# Altium PCB PCB1.PcbDoc
Units mil, origin at the board's own origin, x right, y up, seen from the top; angles counter-clockwise.
Board outline 1495 x 625 mil, 2 copper layers (Top Layer, Bottom Layer); 8 components, 8 nets, 17 pads, 0 vias.
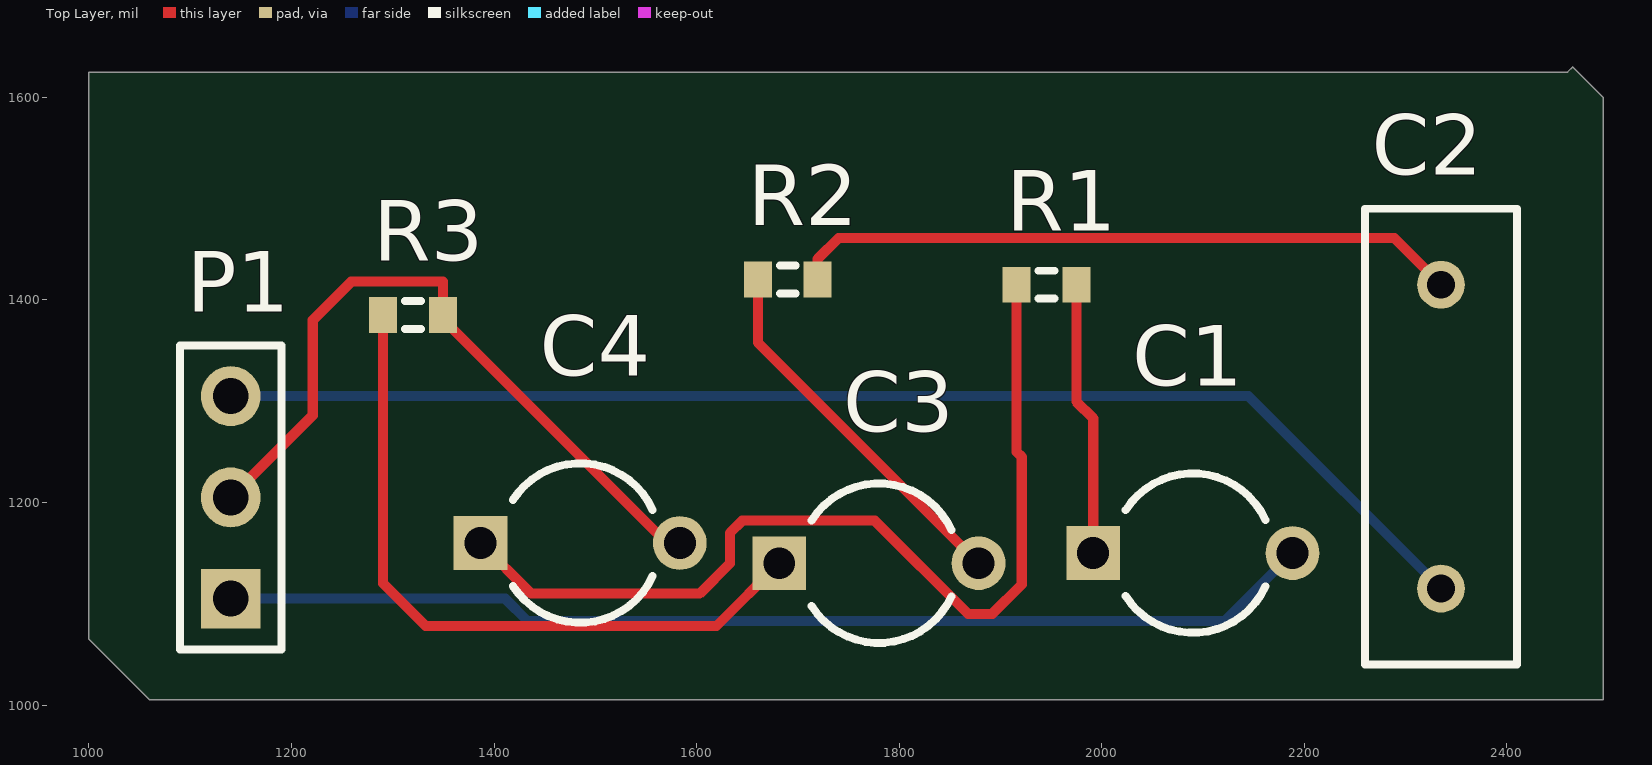
[diagram p0: Top Layer view]
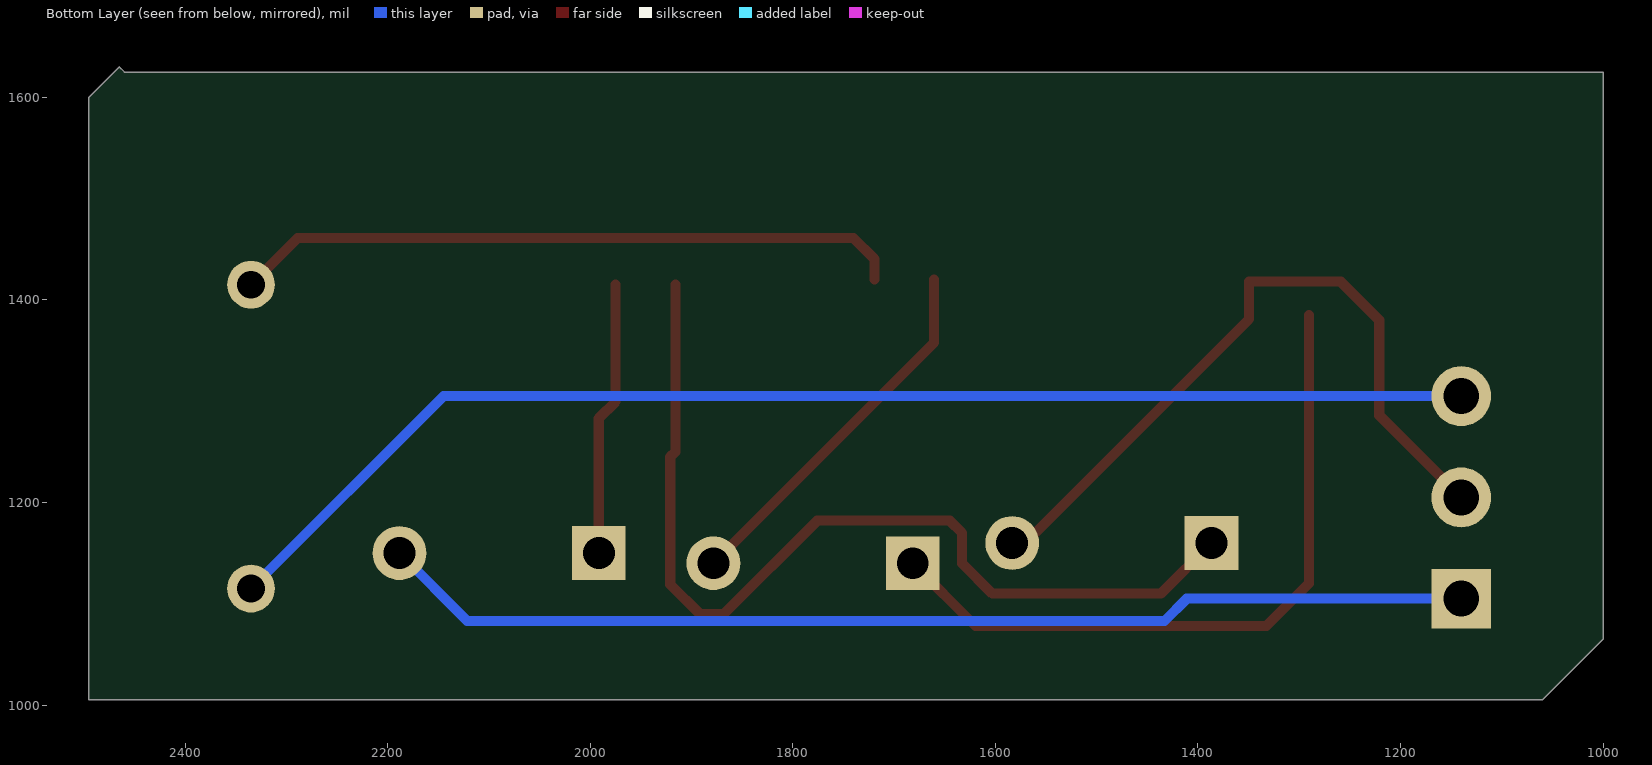
[diagram p1: Bottom Layer view, seen from below]

## Layer stack, top to bottom
Top Solder: solder mask 0.4, Solder Resist, Dk 3.5
Top Layer: signal copper 1.4
Dielectric 1: dielectric 12.6, FR-4, Dk 4.8
Bottom Layer: signal copper 1.4
Bottom Solder: solder mask 0.4, Solder Resist, Dk 3.5

## Board outline
1000,1625 2460,1625 2465,1630 2495,1600 2495,1005 1060,1005 1000,1065

## Design rules (kind name [scope] priority, off if disabled: settings)
Clearance "GND net width" [All] p1: gap=10 ignorepadtopadclearanceinfootprint=FALSE except(0: Arc-Hole Track-Hole SMDPad-Hole THPad-Hole Via-Hole Fill-Hole Poly-Hole Region-Hole Text-Hole)
Clearance "GND net width" [InNet('-12v')] p2: gap=10 ignorepadtopadclearanceinfootprint=FALSE except(0: Arc-Hole Track-Hole SMDPad-Hole THPad-Hole Via-Hole Fill-Hole Poly-Hole Region-Hole Text-Hole)
Clearance "GND net width" [InNet('-12v')] p3: gap=10 ignorepadtopadclearanceinfootprint=FALSE except(0: Arc-Hole Track-Hole SMDPad-Hole THPad-Hole Via-Hole Fill-Hole Poly-Hole Region-Hole Text-Hole)
Clearance [All] p4: gap=10 ignorepadtopadclearanceinfootprint=FALSE except(0: Arc-Hole Track-Hole SMDPad-Hole THPad-Hole Via-Hole Fill-Hole Poly-Hole Region-Hole Text-Hole)
PolygonConnect [All] p1: connectstyle=Relief reliefconductorwidth=10 reliefentries=4 polygonreliefangle="90 Angle" airgapwidth=10
RoutingVias [All] p1: holewidth=28 width=50 viastyle="Through Hole" minholewidth=28 minwidth=50 maxholewidth=28 maxwidth=50
SolderMaskExpansion [All] p1: expansion=4 istentingtop=FALSE
Width [All] p1: maxlimit=10 minlimit=10 preferedwidth=10
30 further rules are at their usual default settings.

## Components (designator, comment, footprint, x,y, rotation, side; value= is the part's Value field where it differs from the comment)
C1 "Cap Pol1" CAPR5-4X5 2090,1150 r0 top value=100pF
C2 "Cap" RAD-0.3 2335,1265 r90 top value=100pF
C3 "Cap Pol1" CAPR5-4X5 1780,1140 r0 top value=100pF
C4 "Cap Pol1" CAPR5-4X5 1485,1160 r0 top value=100pF
P1 "power" HDR1X3 1140,1105 r90 top
R1 "Res3" J1-0603 1945.47,1415 r0 top value=1K
R2 "Res3" J1-0603 1690,1420 r0 top value=1K
R3 "Res3" J1-0603 1320,1385 r0 top value=1K

## Footprints (in the part's own frame and the unit in brackets; to place one, negate y for a bottom-side part, rotate by r counter-clockwise, add the part's x,y. Pads: shape width x height; smd on the part's side, far side on the other; paste and mask are expansions set on the pad)
CAPR5-4X5 [mm] "Capacitor; 2 Leads"
  rect 1.35x1.35 hole 0.8: 1(-2.5,0)
  round 1.35 hole 0.8: 2(2.5,0)
  silkscreen extent -1.69,-2 1.82,2
HDR1X3 [mm] "Connector; Header; 3 Position"
  rect 1.5x1.5 hole 0.9: 1(0,0)
  round 1.5 hole 0.9: 2(2.54,0) 3(5.08,0)
  silkscreen extent -1.27,-1.27 6.35,1.27
J1-0603 [mm] "Chip Resistor, Body 1.6x0.8mm, IPC High Density"
  rect 0.7x0.9 smd: 1(-0.75,0) 2(0.75,0)
  silkscreen extent -0.2,-0.35 0.2,0.35, body extent -0.85,-0.48 0.85,0.48, height 0.9
RAD-0.3 [mm] "Radial Cap, Thru-Hole; 2 Leads; 0.3 in Pin Spacing"
  round 1.2 hole 0.7: 1(-3.81,0) 2(3.81,0)
  silkscreen extent -5.71,-1.91 5.71,1.91

## Part data
C1 C3 C4: "Polarized Capacitor (Radial)", LatestRevisionDate=17-Jul-2002, LatestRevisionNote="Re-released for DXP Platform.", PackageDescription="Polarized Capacitor (Radial); 2 Leads", PackageReference=RB7.6-15, Published=8-Jun-2000, Publisher="Altium Limited"
C2: "Capacitor", LatestRevisionDate=17-Jul-2002, LatestRevisionNote="Re-released for DXP Platform.", PackageDescription="Radial Cap, Thru-Hole; 2 Leads; 0.3 in Pin Spacing", PackageReference=RAD-0.3, Published=8-Jun-2000, Publisher="Altium Limited"
P1: library part "Header 3", "Header, 3-Pin", LatestRevisionDate=17-Jul-2002, LatestRevisionNote="Re-released for DXP Platform.", Publisher="Altium Limited"
R1 R2 R3: "Resistor", LatestRevisionDate=29-May-2009, LatestRevisionNote="IPC-7351 Footprint Added.", PackageDescription="Chip Resistor", PackageReference=J1-0603, Published=8-Jun-2000, Publisher="Altium Limited"

## Nets (pads, with @x,y where several pads share a name; then routed paths per layer and width w, separated by ;. In a path a pad name is that pad's centre, name@x,y a point inside that pad or via, vN(x,y) a via of type N, cw(c..) or ccw(c..) an arc to the next point about the centre after c; other vN are vias at no path point)
+12v: C1.1 R1.2 | length 271.9
  Top Layer w10: R1.2 1975,1299.57 1991.57,1283 C1.1
-12v: C2.2 R2.2 | length 663.5
  Top Layer w10: R2.2 1719.53,1440.53 1740,1461 2289,1461 C2.2
GND: C4.2 P1.2 R3.2 | length 715.3
  Top Layer w10: P1.2 1221,1286 1221,1380 1259,1418 1349.53,1418 R3.2 1349.53,1381 1570.53,1160 C4.2
NetC1_2: C1.2 P1.1 | length 1085.3
  Bottom Layer w10: P1.1 1411,1105 1433,1083 2121.43,1083 C1.2
NetC2_1: C2.1 P1.3 | length 1273.7
  Bottom Layer w10: P1.3 2145,1305 C2.1
NetC3_1: C3.1 R3.1 | length 699.2
  Top Layer w10: R3.1 1290.47,1120 1332.47,1078 1619.57,1078 C3.1
NetC3_2: C3.2 R2.1 | length 370.3
  Top Layer w10: R2.1 1660.47,1357.95 C3.2
NetC4_1: C4.1 R1.1 | length 950.7
  Top Layer w10: C4.1 1436.57,1110 1603,1110 1633,1140 1633,1170 1645,1182 1776,1182 1868,1090 1892,1090 1921,1119 1921,1245 1915.94,1250.06 R1.1

## Polygon pours and split planes (outlines as drawn)
no net on Layer0 "Default Coverlay 1 Top" (split plane): 1000,1000 7000,1000 7000,5000 1000,5000
no net on Layer0 "Default Coverlay 1 Bottom" (split plane): 1000,1000 7000,1000 7000,5000 1000,5000